# Allegro board AC7020.brd
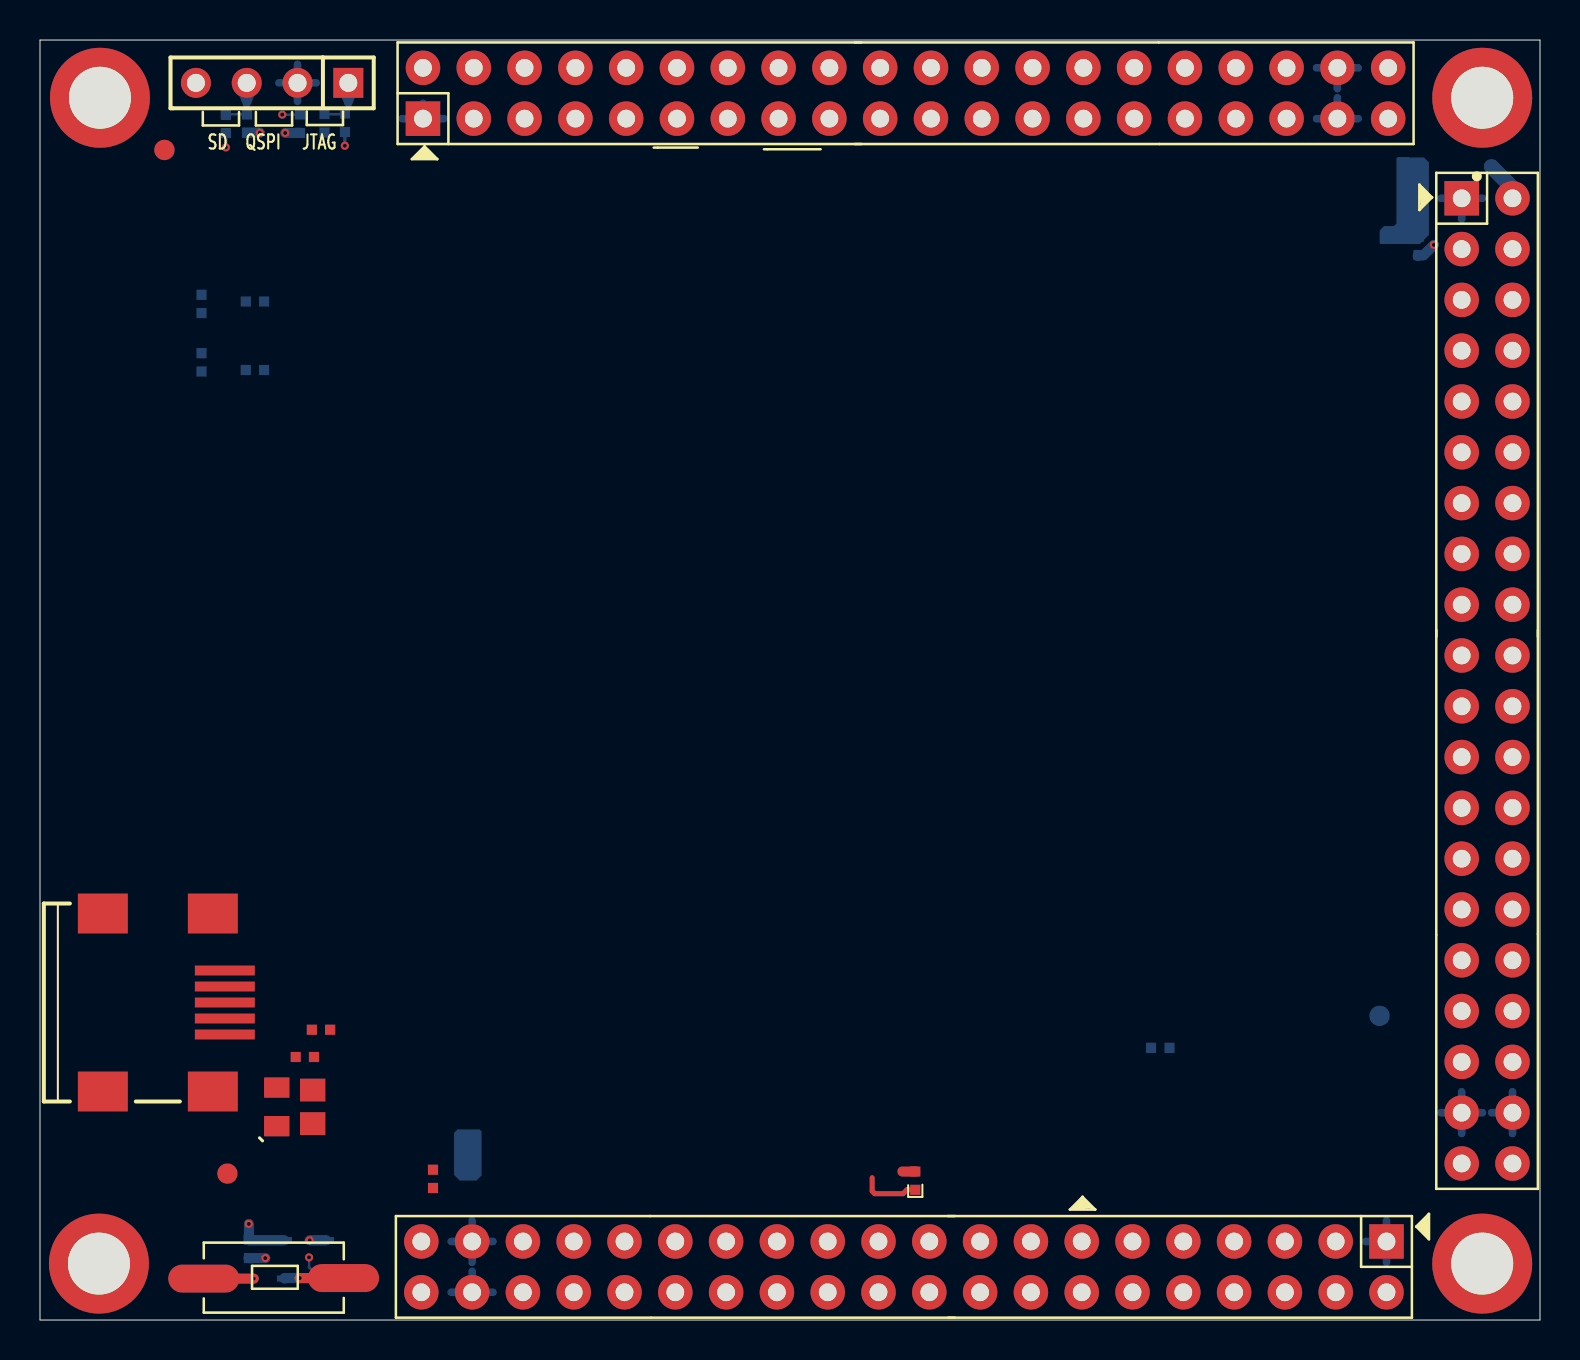
[diagram p0: board, top side]
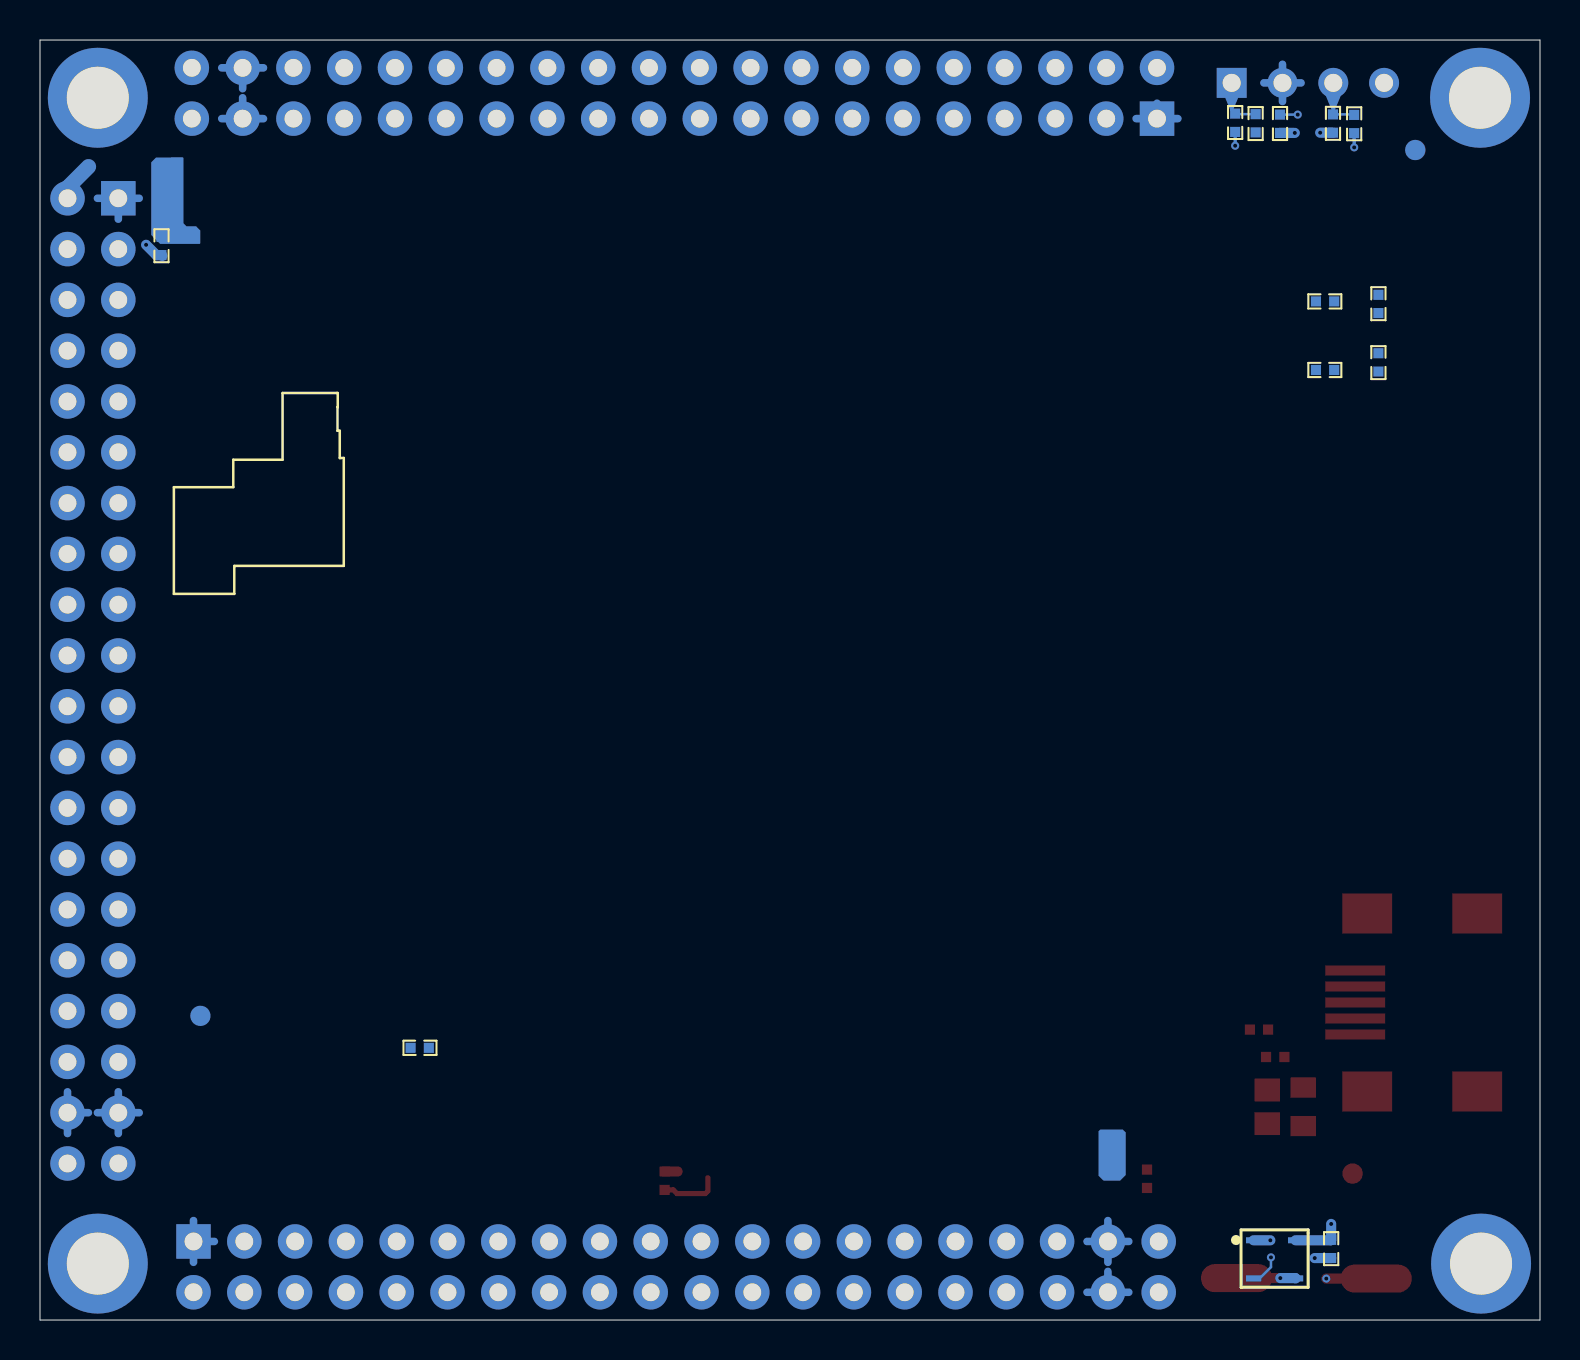
[diagram p1: board, bottom side, seen from below]

Outline 75 x 64 mm; copper layers: TOP, SGND, IN1, IN2, SVCC, IN3, SGND1, BOTTOM. Coordinates in mm from the lower left corner of the outline.
Outline path: 0,64 0,0 75,0 75,64 0,64

## Design rules (mm)
net group DDR3_ADRESS: nets DDR3_A14 DDR3_RESET
net group SD_CLK: nets N28238116 SD_CLK
net group BL-DIFF-J10: nets IO34_L1N IO34_L1P IO34_L2N IO34_L2P IO34_L3N IO34_L3P IO34_L4N IO34_L4P IO34_L5N IO34_L5P IO34_L6N IO34_L6P IO34_L7N IO34_L7P IO34_L8N IO34_L8P IO34_L9N IO34_L9P IO34_L10N IO34_L10P IO34_L11N IO34_L11P IO34_L13N IO34_L13P IO34_L14N IO34_L14P
net group BL-DIFF-J11: nets IO34_L15N IO34_L15P IO34_L16N IO34_L16P IO34_L17N IO34_L17P IO34_L18N IO34_L18P IO34_L19N IO34_L19P IO34_L20N IO34_L20P IO34_L21N IO34_L21P IO34_L22N IO34_L22P IO34_L23N IO34_L23P IO34_L24N IO34_L24P IO35_L7N IO35_L7P IO35_L9N IO35_L9P IO35_L11N IO35_L11P IO35_L21N IO35_L21P IO35_L22N IO35_L22P IO35_L23N IO35_L23P IO35_L24N IO35_L24P
net group BL-DIFF-J12: nets IO35_L1N IO35_L1P IO35_L2N IO35_L2P IO35_L3N IO35_L3P IO35_L4N IO35_L4P IO35_L5N IO35_L5P IO35_L6N IO35_L6P IO35_L8N IO35_L8P IO35_L10N IO35_L10P IO35_L12N IO35_L12P IO35_L13N IO35_L13P IO35_L14N IO35_L14P IO35_L15N IO35_L15P IO35_L16N IO35_L16P IO35_L17N IO35_L17P IO35_L18N IO35_L18P IO35_L19N IO35_L19P IO35_L20N IO35_L20P
net group DDR3_D0: nets DDR3_D0 DDR3_D1 DDR3_D2 DDR3_D3 DDR3_D4 DDR3_D5 DDR3_D6 DDR3_D7 DDR3_DQS0_N DDR3_DQS0_P
net group DDR3_D0-D7: nets DDR3_DM0
net group DDR3_D1: nets DDR3_D8 DDR3_D9 DDR3_D10 DDR3_D11 DDR3_D12 DDR3_D13 DDR3_D14 DDR3_D15 DDR3_DQS1_N DDR3_DQS1_P
net group DDR3_D2: nets DDR3_D16 DDR3_D17 DDR3_D18 DDR3_D19 DDR3_D20 DDR3_D21 DDR3_D22 DDR3_D23 DDR3_DQS2_N DDR3_DQS2_P
net group DDR3_D3: nets DDR3_D24 DDR3_D25 DDR3_D26 DDR3_D27 DDR3_D28 DDR3_D29 DDR3_D30 DDR3_D31 DDR3_DM3 DDR3_DQS3_N DDR3_DQS3_P
net group DDR3_D8-D15: nets DDR3_DM1
net group DDR3_D16-D23: nets DDR3_DM2
net group ETH_RX: nets ETH_RXCK ETH_RXCTL ETH_RXD0 ETH_RXD1 ETH_RXD2 ETH_RXD3
net group ETH_TX: nets ETH_TXCK ETH_TXCTL ETH_TXD0 ETH_TXD1 ETH_TXD2 ETH_TXD3
net group OTG_DATA: nets OTG_CLK OTG_DATA0 OTG_DATA1 OTG_DATA2 OTG_DATA3 OTG_DATA4 OTG_DATA5 OTG_DATA6 OTG_DATA7 OTG_DIR OTG_NXT OTG_STP
net group PHY_MDI: nets PHY_MDI0_N PHY_MDI0_P PHY_MDI1_N PHY_MDI1_P PHY_MDI2_N PHY_MDI2_P PHY_MDI3_N PHY_MDI3_P
net group QSPI: nets QSPI_CS QSPI_D0 QSPI_D1 QSPI_D2 QSPI_D3 QSPI_SCK
net group SD: nets SD_CD SD_CMD SD_D0 SD_D1 SD_D2 SD_D3
net group USB: nets N28234940 N28234974 OTG_D_N OTG_D_P

## Placement (name value [footprint] x y rotation side)
C27  0.1uF  [C0402]  10.44 3.55 270 bottom
C181  0.1uF  [C0402]  8.08 47.88 90 bottom
C182  0.1uF  [C0402]  8.08 50.8 270 bottom
C192  0.1uF  [C0402]  68.93 53.7 270 bottom
C200  10uF  [C0805]  13.63 10.66 270 top
C201  1uF  [C0402]  13.24 13.15 180 top
J7  MINI_USB  [MINIUSBB]  9.24 15.88 0 top
J10  HEADER 20x2/M  [IDC-40J]  43.2 2.66 180 top
J11  HEADER 20x2/M  [IDC-40J]  72.35 31.96 270 top
J12  HEADER 20x2/M  [IDC-40J]  43.28 61.34 0 top
J13  4 HEADER  [DIP-4]  15.42 61.86 180 top
KEY1  Button  [KEY735SO]  8.19 2.07 0 top
NOREF  -  [unnamed]  9.37 7.32 0 top
NOREF#2  -  [unnamed#2]  2.95 2.82 0 top
NOREF#3  -  [unnamed]  6.22 58.5 0 top
NOREF#4  -  [unnamed#2]  3 61.11 0 top
NOREF#5  -  [unnamed#2]  72.11 61.11 0 top
NOREF#6  -  [unnamed#2]  72.11 2.82 0 top
NOREF#7  -  [unnamed]  66.98 15.21 180 bottom
NOREF#8  -  [unnamed]  6.24 58.5 180 bottom
R19  20K  [R0402]  13 59.81 270 bottom
R21  10K  [R0402]  10.35 59.82 270 bottom
R22  1K  [R0402]  14.22 59.83 90 bottom
R23  20K  [R0402]  9.29 59.8 270 bottom
R24  20K  [R0402]  15.24 59.86 270 bottom
R35  4.7K  [R0402]  56.01 13.61 0 bottom
R40  330R  [R0402]  10.75 47.5 180 bottom
R41  330R  [R0402]  10.75 50.93 180 bottom
R94  4.7K  [R0402]  19.65 7.06 90 top
R159  10K  [R0402]  14.05 14.51 180 top
R161  0R  [R0805]  11.84 10.66 90 top
R216  100K  [R0402]  43.76 6.97 270 top
U7  -  [TCM811TERCTR]  13.27 3.03 270 bottom

## Library data of the parts
C27 C192 C200 C201 = CAP NP
C181 C182 = CAP_3
J7 = USB_B_3
J10-J12 = HEADER 20x2/M
J13 = 4 HEADER
KEY1 = Button_0
R19 R21-R24 R35 R94 R159 R216 = RESISTOR
R40 R41 = R_2
R161 = RESISTOR_0
U7 = TCM811TERCTR_0

## Footprints (pads in the part's own frame, mm; a bottom-side part is the same pattern mirrored in y, then rotated)
C0402
  rect 0.508x0.508 smd: 1(-0.457,0) 2(0.457,0)
C0805
  rect 1.143x1.27 smd: 1(-0.838,0) 2(0.838,0)
DIP-4
  rect 1.5x1.5 hole 0.9: 1(0,0)
  round 1.5 hole 0.9: 2(2.54,0) 3(5.08,0) 4(7.62,0)
IDC-40J
  rect 1.727x1.727 hole 0.889: 1(-24.13,-1.27)
  round 1.727 hole 0.889: 2(-24.13,1.27) 3(-21.59,-1.27) 4(-21.59,1.27) 5(-19.05,-1.27) 6(-19.05,1.27) 7(-16.51,-1.27) 8(-16.51,1.27) 9(-13.97,-1.27) 10(-13.97,1.27) 11(-11.43,-1.27) 12(-11.43,1.27) 13(-8.89,-1.27) 14(-8.89,1.27) 15(-6.35,-1.27) 16(-6.35,1.27) 17(-3.81,-1.27) 18(-3.81,1.27) 19(-1.27,-1.27) 20(-1.27,1.27) 21(1.27,-1.27) 22(1.27,1.27) 23(3.81,-1.27) 24(3.81,1.27) 25(6.35,-1.27) 26(6.35,1.27) 27(8.89,-1.27) 28(8.89,1.27) 29(11.43,-1.27) 30(11.43,1.27) 31(13.97,-1.27) 32(13.97,1.27) 33(16.51,-1.27) 34(16.51,1.27) 35(19.05,-1.27) 36(19.05,1.27) 37(21.59,-1.27) 38(21.59,1.27) 39(24.13,-1.27) 40(24.13,1.27)
KEY735SO
  oval 3.556x1.4 smd: 1(0,0) 2(6.985,0.025)
MINIUSBB
  rect 3x0.5 smd: 1(0,1.6) 2(0,0.8) 3(0,0) 4(0,-0.8) 5(0,-1.6)
  rect 2.5x2 smd: 6(-0.6,-4.45) 7(-6.1,-4.45) 8(-0.6,4.45) 9(-6.1,4.45)
R0402
  rect 0.508x0.508 smd: 1(-0.457,0) 2(0.457,0)
R0805
  rect 1.016x1.27 smd: 1(-0.965,0) 2(0.965,0)
TCM811TERCTR
  rect 0.305x0.762 smd: 1(-0.953,-1.05) 2(0.953,-1.05) 3(0.953,1.05) 4(-0.953,1.05)
unnamed
  round 1.016 smd: 1(0,0)
unnamed#2
  round 5 hole 3.1: 1(0,0)

## Nets
GND: C27.2 C181.2 C182.2 C192.2 C200.2 C201.2 J7.5(GND) J7.6(SH1) J7.7(SH2) J7.8(SH3) J7.9(SH4) J10.1 J10.37 J10.38 J11.1 J11.37 J11.38 J12.1 J12.37 J12.38 J13.2 KEY1.1(P1) R19.2 R21.2 R35.2 R94.1 U7.1(GND)
VCC3V3: C27.1 J10.39 J10.40 J11.39 J11.40 J12.39 J12.40 J13.4 R22.1 R216.1 U7.4(VDD)
VCC5V: C192.1 J10.2 J11.2 J12.2 R161.1
DDR3_RESET: R35.1
IO34_L1N: J10.27
IO34_L1P: J10.28
IO34_L2N: J10.25
IO34_L2P: J10.26
IO34_L3N: J10.21
IO34_L3P: J10.22
IO34_L4N: J10.24
IO34_L4P: J10.23
IO34_L5N: J10.19
IO34_L5P: J10.20
IO34_L6N: J10.18
IO34_L6P: J10.17
IO34_L7N: J10.10
IO34_L7P: J10.9
IO34_L8N: J10.14
IO34_L8P: J10.13
IO34_L9N: J10.5
IO34_L9P: J10.6
IO34_L10N: J10.11
IO34_L10P: J10.12
IO34_L11N: J10.16
IO34_L11P: J10.15
IO34_L13N: J10.8
IO34_L13P: J10.7
IO34_L14N: J10.3
IO34_L14P: J10.4
IO34_L15N: J11.13
IO34_L15P: J11.14
IO34_L16N: J11.21
IO34_L16P: J11.22
IO34_L17N: J11.26
IO34_L17P: J11.25
IO34_L18N: J11.30
IO34_L18P: J11.29
IO34_L19N: J11.20
IO34_L19P: J11.19
IO34_L20N: J11.12
IO34_L20P: J11.11
IO34_L21N: J11.28
IO34_L21P: J11.27
IO34_L22N: J11.23
IO34_L22P: J11.24
IO34_L23N: J11.4
IO34_L23P: J11.3
IO34_L24N: J11.6
IO34_L24P: J11.5
IO35_L1N: J12.30
IO35_L1P: J12.29
IO35_L2N: J12.28
IO35_L2P: J12.27
IO35_L3N: J12.3
IO35_L3P: J12.4
IO35_L4N: J12.32
IO35_L4P: J12.31
IO35_L5N: J12.34
IO35_L5P: J12.33
IO35_L6N: J12.6
IO35_L6P: J12.5
IO35_L7N: J11.9
IO35_L7P: J11.10
IO35_L8N: J12.26
IO35_L8P: J12.25
IO35_L9N: J11.7
IO35_L9P: J11.8
IO35_L10N: J12.19
IO35_L10P: J12.20
IO35_L11N: J11.18
IO35_L11P: J11.17
IO35_L12N: J12.13
IO35_L12P: J12.14
IO35_L13N: J12.18
IO35_L13P: J12.17
IO35_L14N: J12.10
IO35_L14P: J12.9
IO35_L15N: J12.36
IO35_L15P: J12.35
IO35_L16N: J12.16
IO35_L16P: J12.15
IO35_L17N: J12.11
IO35_L17P: J12.12
IO35_L18N: J12.8
IO35_L18P: J12.7
IO35_L19N: J12.22
IO35_L19P: J12.21
IO35_L20N: J12.24
IO35_L20P: J12.23
IO35_L21N: J11.32
IO35_L21P: J11.31
IO35_L22N: J11.36
IO35_L22P: J11.35
IO35_L23N: J11.34
IO35_L23P: J11.33
IO35_L24N: J11.16
IO35_L24P: J11.15
PHY_AD0/LED1: R40.1
PHY_AD1/LED2: R41.1
PS_MIO7: R19.1
PS_MIO8: J10.32
PS_MIO9: J10.29
PS_MIO10: J10.35
PS_MIO11: J10.31
PS_MIO12: J10.36
PS_MIO13: J10.33
PS_MIO14: J10.30
PS_MIO15: J10.34
PS_POR_B: U7.2(#RESET)
QSPI_D2: R23.2
QSPI_D3: R24.2
N27716782: C182.1 R41.2
N27716862: C181.1 R40.2
N27757110: R94.2
N28208691: R216.2
N28234940: J7.2(D-)
N28234974: J7.3(D+)
N28234993: R159.1
N28235009: C200.1 C201.1 R159.2
N28237125: J13.1 R22.2 R24.1
N28237130: J13.3 R21.1 R23.1
N28434462: J7.1(VCC) R161.2
N28529199: KEY1.2(P2) U7.3(#MR)

Pads without a net: J7 4; NOREF 1; NOREF#2 1; NOREF#3 1; NOREF#4 1; NOREF#5 1; NOREF#6 1; NOREF#7 1; NOREF#8 1

## Via types
v1: diameter 0.406, hole 0.203, TOP to BOTTOM, 12 vias

## Routing (per net, layer and track width the routed paths; a pad name or vN(x,y) marks a point on that pad's centre or on a via; arc(x,y) is an arc through that point)
GND: length 116.5
  TOP w0.508: KEY1.1 v1(10.69,2.07)
  SGND w0.381: J10.37 22.65,3.93 ; J10.37 21.61,2.88 ; J10.37 20.56,3.93 ; J10.37 21.61,4.97 ; J12.38 65.91,62.61 ; J12.38 63.83,62.61 ; J12.38 64.87,61.57 ; 67.33,2.88 J10.1 ; J10.1 66.28,3.93 ; J10.1 68.37,3.93 ; J10.1 67.33,4.97 ; 71.08,55.04 J11.1 ; J11.1 70.04,56.09 ; J11.1 72.13,56.09 ; J11.1 71.08,57.13 ; 19.15,59.03 J12.1 ; J12.1 19.15,61.11 ; J12.1 20.19,60.07 ; J12.1 18.11,60.07 ; J10.38 22.65,1.39 ; J10.38 20.56,1.39 ; J10.38 21.61,2.43 ; J13.2 13.8,61.86 ; J13.2 11.95,61.86 ; J13.2 12.88,60.93 ; J13.2 12.88,62.78 ; J12.37 64.87,61.11 ; J12.37 63.83,60.07 ; J12.37 64.87,59.03 ; J12.37 65.91,60.07 ; J11.37 72.13,10.37 ; J11.37 70.04,10.37 ; J11.37 71.08,9.32 ; J11.37 71.08,11.41 ; J11.38 73.62,11.41 ; J11.38 73.62,9.32 ; J11.38 72.58,10.37
  SGND1 w0.381: 11.95,61.86 J13.2 ; J13.2 12.88,60.93 ; J13.2 13.8,61.86 ; J13.2 12.88,62.78 ; 64.87,59.03 J12.37 ; J12.37 65.91,60.07 ; J12.37 63.83,60.07 ; J12.37 64.87,61.11 ; 70.04,10.37 J11.37 ; J11.37 72.13,10.37 ; J11.37 71.08,11.41 ; J11.37 71.08,9.32 ; J11.38 73.62,11.41 ; J11.38 72.58,10.37 ; J11.38 73.62,9.32 ; J12.1 20.19,60.07 ; J12.1 19.15,59.03 ; J12.1 19.15,61.11 ; J12.1 18.11,60.07 ; 70.04,56.09 J11.1 ; J11.1 72.13,56.09 ; J11.1 71.08,55.04 ; J11.1 71.08,57.13 ; J10.1 67.33,4.97 ; J10.1 67.33,2.88 ; J10.1 66.28,3.93 ; J10.1 68.37,3.93 ; 21.61,2.88 J10.37 ; J10.37 20.56,3.93 ; J10.37 21.61,4.97 ; J10.37 22.65,3.93 ; 63.83,62.61 J12.38 ; J12.38 64.87,61.57 ; J12.38 65.91,62.61 ; 20.56,1.39 J10.38 ; J10.38 21.61,2.43 ; J10.38 22.65,1.39
  BOTTOM w0.381: 63.83,62.61 J12.38 ; J12.38 65.91,62.61 ; J12.38 64.87,61.57 ; J10.37 22.65,3.93 ; J10.37 21.61,2.88 ; J10.37 21.61,4.97 ; J10.37 20.56,3.93 ; J13.2 12.88,62.78 ; J13.2 12.88,60.93 ; J13.2 11.95,61.86 ; J13.2 13.8,61.86 ; J10.38 22.65,1.39 ; J10.38 21.61,2.43 ; J10.38 20.56,1.39 ; J11.1 72.13,56.09 ; J11.1 70.04,56.09 ; J11.1 71.08,55.04 ; J12.37 65.91,60.07 ; J12.37 64.87,61.11 ; J12.37 63.83,60.07 ; 66.28,3.93 J10.1 ; J10.1 67.33,2.88 ; J10.1 67.33,4.97 ; 18.11,60.07 J12.1 ; J12.1 19.15,59.95 ; J12.1 20.19,60.07 ; J12.1 19.15,60.84 ; 72.58,10.37 J11.38 ; J11.38 73.62,11.41 ; J11.38 73.62,9.32 ; 71.08,9.32 J11.37 ; J11.37 71.08,11.41 ; J11.37 72.13,10.37 ; J11.37 70.04,10.37
  BOTTOM w0.508: R21.2 v1(10.99,59.36) ; v1(69.7,53.76) 69.18,53.24 C192.2 68.89,53.21 ; R19.2 v1(12.26,59.35) ; C27.2 v1(11.26,3.1) ; U7.1 v1(13.48,3.99)
VCC3V3: length 28.8
  TOP w0.508: R216.1 43.12,7.42
  SVCC w0.381: 6.87,61.86 J13.4 ; J13.4 7.8,62.78 ; J13.4 8.72,61.86 ; J13.4 7.8,60.93 ; 18.02,1.39 J10.40 ; J10.40 20.11,1.39 ; J10.40 19.07,2.43 ; 67.41,59.03 J12.39 ; J12.39 68.45,60.07 ; J12.39 66.37,60.07 ; J12.39 67.41,61.11 ; 67.41,61.57 J12.40 ; J12.40 66.37,62.61 ; J12.40 68.45,62.61 ; J10.39 19.07,4.97 ; J10.39 19.07,2.88 ; J10.39 20.11,3.93 ; J10.39 18.02,3.93 ; 71.08,6.78 J11.39 ; J11.39 70.04,7.83 ; J11.39 72.13,7.83 ; J11.39 71.08,8.87 ; 73.62,6.78 J11.40 ; J11.40 73.62,8.87 ; J11.40 72.58,7.83
  BOTTOM w0.508: v1(10.44,4.8) C27.1 10.47,3.99 U7.4
VCC5V: length 5.1
  IN3 w0.381: 18.11,62.61 J12.2 ; J12.2 19.15,61.57 ; J12.2 20.19,62.61
  BOTTOM w0.762: 72.58,57.67 73.62,56.62 J11.2
IO34_L1N: length 5
  IN3 w0.089: J10.27 34.31,2.89 34.39,2.8 35.05,2.8 35.48,3.22 35.48,5.82
IO34_L1P: length 5.4
  IN3 w0.089: J10.28 34.31,2.43 34.39,2.52 35.17,2.52 35.76,3.1 35.76,5.7
IO34_L2N: length 4
  IN3 w0.089: J10.25 36.85,2.89 36.93,2.8 37.64,2.8 37.97,3.13 37.97,4.79
IO34_L2P: length 4.3
  IN3 w0.089: 38.25,4.67 38.25,3.01 37.75,2.52 36.93,2.52 36.85,2.43 J10.26
IO34_L3N: length 27.3
  IN3 w0.089: 65.18,6.67 44.41,6.67 43.15,5.4 43.15,3.14 42.8,2.8 42.01,2.8 41.93,2.89 J10.21
IO34_L3P: length 27.4
  IN3 w0.089: 65.3,6.39 44.53,6.39 43.43,5.28 43.43,3.03 42.91,2.52 42.01,2.52 41.93,2.43 J10.22
IO34_L4N: length 30.1
  IN3 w0.089: J10.24 39.39,2.43 39.47,2.52 40.4,2.52 40.86,2.98 40.86,4.53 44.32,7.99 47.41,7.99 48.29,7.11 64.89,7.11
IO34_L4P: length 4
  IN3 w0.089: 40.58,4.65 40.58,3.1 40.28,2.8 39.47,2.8 39.39,2.89 J10.23
IO34_L5N: length 24.6
  IN3 w0.089: 65.58,5.96 46.69,5.96 46.5,5.77 46.49,5.77 45.63,4.9 45.63,3.02 45.4,2.8 44.55,2.8 44.47,2.89 J10.19
IO34_L5P: length 24.7
  IN3 w0.089: 65.69,5.68 46.81,5.68 46.61,5.49 46.61,5.49 45.91,4.78 45.91,2.91 45.52,2.52 44.55,2.52 44.47,2.43 J10.20
IO34_L6N: length 7
  IN2 w0.089: 48.4,6.03 48.16,5.79 47.65,5.79 47.58,5.71 47.58,5.6 47.65,5.52 48.16,5.52 48.4,5.28 48.4,2.9 48.02,2.52 47.09,2.52 47.01,2.43 J10.18
IO34_L6P: length 6.8
  IN2 w0.089: 48.13,6.26 48.13,6.15 48.05,6.07 47.54,6.07 47.3,5.83 47.3,5.48 47.54,5.24 48.05,5.24 48.13,5.16 48.13,3.01 47.91,2.8 47.09,2.8 47.01,2.89 J10.17
IO34_L7N: length 17.5
  IN2 w0.089: 65.71,5.7 59.85,5.7 59.77,5.62 59.77,5.35 59.53,5.11 59.19,5.11 58.94,5.35 58.94,5.62 58.87,5.7 56.48,5.7 56.42,5.64 56.42,5.36 56.5,5.28 58.32,5.28 58.58,5.03 58.58,2.94 58.16,2.52 57.25,2.52 57.17,2.43 J10.10
IO34_L7P: length 17.3
  IN2 w0.089: J10.9 57.17,2.89 57.25,2.8 58.04,2.8 58.3,3.05 58.3,4.91 58.21,5.01 56.38,5.01 56.14,5.25 56.14,5.75 56.37,5.98 58.98,5.98 59.22,5.74 59.22,5.47 59.3,5.39 59.41,5.39 59.49,5.47 59.49,5.74 59.73,5.98 65.59,5.98
IO34_L8N: length 6.5
  IN2 w0.089: J10.14 52.09,2.43 52.17,2.52 52.89,2.52 53.51,3.14 53.51,5.1 53.24,5.37 52.02,5.37 51.9,5.49
IO34_L8P: length 5.9
  IN2 w0.089: 51.62,5.38 51.91,5.09 53.13,5.09 53.23,4.98 53.23,3.26 52.77,2.8 52.17,2.8 52.09,2.89 J10.13
IO34_L9N: length 47.4
  IN3 w0.089: 69.51,44.25 69.51,8.62 66.2,5.31 63.97,5.31 63.45,4.79 63.45,3.13 63.12,2.8 62.33,2.8 62.25,2.89 J10.5
IO34_L9P: length 52.2
  IN3 w0.089: 68.57,47.28 68.91,47.28 69.16,47.03 69.16,46.69 68.36,45.9 68.36,45.79 69.79,44.36 69.79,8.5 66.32,5.03 64.09,5.03 63.73,4.67 63.73,3.01 63.23,2.52 62.33,2.52 62.25,2.43 J10.6
IO34_L10N: length 8
  IN2 w0.089: 52.26,6.03 52.53,5.76 54.69,5.76 55.74,4.71 55.74,3.06 55.48,2.8 54.71,2.8 54.63,2.89 J10.11
IO34_L10P: length 8.7
  IN2 w0.089: 52.54,6.3 52.54,6.15 52.65,6.04 54.81,6.04 56.02,4.83 56.02,2.94 55.6,2.52 54.71,2.52 54.63,2.43 J10.12
IO34_L11N: length 9
  IN2 w0.089: J10.16 49.55,2.43 49.63,2.52 50.61,2.52 50.98,2.88 50.98,5.36 50.73,5.6 49.32,5.6 49.24,5.68 49.24,5.79 49.32,5.87 50.73,5.87 50.98,6.11
IO34_L11P: length 8.6
  IN2 w0.089: J10.15 49.55,2.89 49.63,2.8 50.49,2.8 50.7,3 50.7,5.24 50.62,5.32 49.2,5.32 48.96,5.56 48.96,5.9 49.2,6.15 50.62,6.15 50.7,6.23
IO34_L13N: length 46.7
  IN2 w0.089: 69.11,40.81 69.11,7.92 66.23,5.05 61.41,5.05 61.09,4.73 61.09,2.91 60.69,2.52 59.79,2.52 59.71,2.43 J10.8
IO34_L13P: length 46.1
  IN2 w0.089: J10.7 59.71,2.89 59.79,2.8 60.58,2.8 60.81,3.03 60.81,4.85 61.29,5.33 66.12,5.33 68.83,8.04 68.83,40.7
IO34_L14N: length 47.9
  IN2 w0.089: 68.74,42.68 68.85,42.68 69.52,42.01 69.52,6.6 69.44,6.52 68.33,6.52 68.09,6.28 68.09,5.93 68.33,5.69 69.44,5.69 69.52,5.61 69.52,4.96 68.76,4.2 68.76,3.14 68.42,2.8 64.87,2.8 64.79,2.89 J10.3
IO34_L14P: length 49
  IN2 w0.089: 68.62,42.96 68.97,42.96 69.8,42.12 69.8,6.48 69.56,6.24 68.45,6.24 68.37,6.16 68.37,6.05 68.45,5.97 69.56,5.97 69.8,5.73 69.8,4.85 69.04,4.08 69.04,3.02 68.53,2.52 64.87,2.52 64.79,2.43 J10.4
IO34_L15N: length 7.8
  IN2 w0.089: 69.01,44.89 69.12,44.89 69.19,44.81 69.19,44.7 68.72,44.22 68.72,43.88 70.58,42.01 72.08,42.01 72.21,41.87 72.21,40.93 72.13,40.85 J11.13
IO34_L15P: length 8.4
  IN2 w0.089: 68.89,45.17 69.23,45.17 69.47,44.92 69.47,44.58 68.99,44.1 68.99,43.99 70.7,42.29 72.2,42.29 72.49,41.99 72.49,40.93 72.58,40.85 J11.14
IO34_L16N: length 13.8
  IN1 w0.089: J11.21 72.13,30.69 72.21,30.77 72.21,31.72 72.13,31.81 69.93,31.81 69.47,32.27 69.47,32.62 69.61,32.75 69.61,32.86 69.53,32.94 69.42,32.94 69.28,32.8 68.85,32.8 68.56,33.09 68.56,33.68 68.85,33.97 69.5,33.97 69.63,34.1 69.63,34.27 69.5,34.4 68.87,34.4 68.57,34.7 68.57,38.29
IO34_L16P: length 13.9
  IN1 w0.089: 68.85,38.41 68.85,34.81 68.99,34.68 69.62,34.68 69.91,34.39 69.91,33.98 69.62,33.69 68.97,33.69 68.84,33.56 68.84,33.21 68.97,33.08 69.16,33.08 69.3,33.22 69.64,33.22 69.89,32.98 69.89,32.64 69.75,32.5 69.75,32.39 70.05,32.09 72.24,32.09 72.49,31.84 72.49,30.77 72.58,30.69 J11.22
IO34_L17N: length 13.9
  IN1 w0.089: 68.94,31.23 68.94,29.46 69.02,29.38 69.23,29.38 69.47,29.14 69.47,28.8 69.23,28.56 69.02,28.56 68.94,28.48 68.94,25.43 69.07,25.3 69.27,25.3 69.4,25.43 69.4,26.73 69.71,27.04 72.17,27.04 72.49,26.72 72.49,25.69 72.58,25.61 J11.26
IO34_L17P: length 13.8
  IN1 w0.089: 68.66,31.12 68.66,29.34 68.91,29.1 69.12,29.1 69.19,29.02 69.19,28.91 69.12,28.84 68.91,28.84 68.66,28.59 68.66,25.31 68.95,25.02 69.39,25.02 69.68,25.31 69.68,26.61 69.82,26.76 72.06,26.76 72.21,26.6 72.21,25.69 72.13,25.61 J11.25
IO34_L18N: length 6.4
  IN1 w0.089: 68.49,21.93 72.26,21.93 72.49,21.69 72.49,20.61 72.58,20.53 J11.30
IO34_L18P: length 6
  IN1 w0.089: J11.29 72.13,20.53 72.21,20.61 72.21,21.58 72.15,21.65 68.37,21.65
IO34_L19N: length 17.7
  IN1 w0.089: J11.20 72.58,33.23 72.49,33.31 72.49,34.33 72.2,34.63 70.62,34.63 69.39,35.86 69.39,38.7 68.6,39.5 68.6,47.36
IO34_L19P: length 8.6
  IN1 w0.089: 69.11,38.59 69.11,35.75 70.51,34.35 72.08,34.35 72.21,34.22 72.21,33.31 72.13,33.23 J11.19
IO34_L20N: length 7.9
  IN2 w0.089: J11.12 72.58,43.39 72.49,43.47 72.49,44.54 72.26,44.78 70.54,44.78 69.08,46.23 69.08,47.82
IO34_L20P: length 7.8
  IN2 w0.089: J11.11 72.13,43.39 72.21,43.47 72.21,44.43 72.14,44.5 70.42,44.5 68.8,46.12 68.8,47.7
IO34_L21N: length 8.8
  IN1 w0.089: 68.44,24.45 68.77,24.45 69.02,24.21 69.02,23.09 69.09,23.01 69.2,23.01 69.28,23.09 69.28,24.21 69.52,24.45 72.16,24.45 72.49,24.11 72.49,23.15 72.58,23.07 J11.28
IO34_L21P: length 8.5
  IN1 w0.089: 68.33,24.17 68.66,24.17 68.74,24.09 68.74,22.97 68.98,22.73 69.32,22.73 69.56,22.97 69.56,24.09 69.64,24.17 72.04,24.17 72.21,24 72.21,23.15 72.13,23.07 J11.27
IO34_L22N: length 6.6
  IN1 w0.089: J11.23 72.13,28.15 72.21,28.23 72.21,29.3 72.15,29.37 70.17,29.37 69.43,30.11 69.43,31.3
IO34_L22P: length 6.7
  IN1 w0.089: 69.71,31.42 69.71,30.22 70.28,29.65 72.27,29.65 72.49,29.42 72.49,28.23 72.58,28.15 J11.24
IO34_L23N: length 12.2
  IN3 w0.089: 67.03,55.68 68,56.64 68.11,56.64 68.18,56.56 68.18,56.45 67.22,55.49 67.22,55.15 70.26,52.11 72.15,52.11 72.49,52.45 72.49,53.46 72.58,53.55 J11.4
IO34_L23P: length 11.9
  IN3 w0.089: 66.92,55.96 67.88,56.92 68.22,56.92 68.46,56.68 68.46,56.34 67.5,55.37 67.5,55.26 70.38,52.38 72.04,52.38 72.21,52.56 72.21,53.46 72.13,53.55 J11.3
IO34_L24N: length 7.4
  IN3 w0.089: 68.64,50.6 68.83,50.79 68.94,50.79 69.14,50.59 69.14,50.48 68.96,50.3 68.96,49.96 69.2,49.71 69.54,49.71 69.72,49.89 69.83,49.89 70.12,49.6 72,49.6 72.49,50.1 72.49,50.92 72.58,51.01 J11.6
IO34_L24P: length 8
  IN3 w0.089: 68.52,51.6 68.52,51.26 68.34,51.07 68.34,50.96 68.42,50.88 68.53,50.88 68.71,51.07 69.05,51.07 69.42,50.7 69.42,50.36 69.24,50.18 69.24,50.07 69.31,49.99 69.42,49.99 69.6,50.17 69.95,50.17 70.24,49.88 71.88,49.88 72.21,50.21 72.21,50.92 72.13,51.01 J11.5
IO35_L1N: length 7.3
  IN1 w0.089: 51.82,58.23 51.82,58.57 52.07,58.81 52.41,58.81 52.84,58.38 52.95,58.38 53.24,58.68 53.24,61.11 53.61,61.48 54.62,61.48 54.71,61.57 J12.30
IO35_L1P: length 6.7
  IN1 w0.089: J12.29 54.71,61.11 54.62,61.2 53.72,61.2 53.52,61 53.52,58.56 53.06,58.1 52.72,58.1 52.29,58.53 52.18,58.53 52.1,58.46 52.1,58.35
IO35_L2N: length 14.2
  IN1 w0.089: 41.44,58.2 41.97,58.73 50.08,58.73 50.78,59.43 50.78,61.21 51.06,61.48 52.08,61.48 52.17,61.57 J12.28
IO35_L2P: length 13.9
  IN1 w0.089: J12.27 52.17,61.11 52.08,61.2 51.17,61.2 51.06,61.09 51.06,59.32 50.2,58.45 42.08,58.45 41.72,58.08
IO35_L3N: length 4.2
  IN2 w0.089: J12.3 21.69,61.11 21.78,61.2 22.61,61.2 22.79,61.02 22.79,59.08
IO35_L3P: length 4.5
  IN2 w0.089: J12.4 21.69,61.57 21.78,61.48 22.73,61.48 23.07,61.14 23.07,59.2
IO35_L4N: length 6.4
  IN1 w0.089: J12.32 57.25,61.57 57.16,61.48 56.16,61.48 55.84,61.15 55.84,59.01 55.41,58.57 54.39,58.57
IO35_L4P: length 6.3
  IN1 w0.089: 54.51,58.3 55.52,58.3 56.12,58.89 56.12,61.04 56.28,61.2 57.16,61.2 57.25,61.11 J12.31
IO35_L5N: length 2.7
  IN1 w0.089: J12.34 59.79,61.57 59.7,61.48 58.82,61.48 58.37,61.03
IO35_L5P: length 2.3
  IN1 w0.089: J12.33 59.79,61.11 59.7,61.2 58.93,61.2 58.65,60.91
IO35_L6N: length 4.2
  IN2 w0.089: J12.6 24.23,61.57 24.32,61.48 25.16,61.48 25.65,60.98 25.65,59.49
IO35_L6P: length 3.8
  IN2 w0.089: J12.5 24.23,61.11 24.32,61.2 25.04,61.2 25.37,60.87 25.37,59.38
IO35_L7N: length 6.9
  IN2 w0.089: J11.9 72.13,45.93 72.21,46.01 72.21,46.88 72,47.09 70.04,47.09 69.56,47.57 69.56,49.45
IO35_L7P: length 7
  IN2 w0.089: 69.83,49.57 69.83,47.68 70.15,47.37 72.12,47.37 72.49,46.99 72.49,46.01 72.58,45.93 J11.10
IO35_L8N: length 15.2
  IN3 w0.089: 55.08,57.16 55.16,57.24 57.21,57.24 57.45,57.48 57.45,57.82 57.21,58.06 55.16,58.06 55.08,58.14 55.08,58.47 54.78,58.78 54.1,58.78 53.86,58.53 53.86,58.22 53.78,58.14 53.67,58.14 53.59,58.22 53.59,58.53 53.35,58.78 51.92,58.78 51.04,59.66 51.04,61.07 50.63,61.48 49.72,61.48 49.63,61.57 J12.26
IO35_L8P: length 14.6
  IN3 w0.089: 54.8,57.27 55.04,57.51 57.1,57.51 57.18,57.59 57.18,57.7 57.1,57.78 55.04,57.78 54.8,58.02 54.8,58.35 54.66,58.5 54.22,58.5 54.14,58.42 54.14,58.11 53.9,57.87 53.56,57.87 53.32,58.11 53.32,58.42 53.24,58.5 51.8,58.5 50.76,59.54 50.76,60.96 50.52,61.2 49.72,61.2 49.63,61.11 J12.25
IO35_L9N: length 4
  IN2 w0.089: 70.34,49.68 71.92,49.68 72.21,49.39 72.21,48.55 72.13,48.47 J11.7
IO35_L9P: length 4.4
  IN2 w0.089: 70.45,49.96 72.04,49.96 72.49,49.51 72.49,48.55 72.58,48.47 J11.8
IO35_L10N: length 6.1
  IN3 w0.089: 42.01,57.73 43.18,58.89 43.18,61.1 43.08,61.2 42.1,61.2 42.01,61.11 J12.19
IO35_L10P: length 6.7
  IN3 w0.089: 42.29,57.61 43.46,58.78 43.46,61.21 43.2,61.48 42.1,61.48 42.01,61.57 J12.20
IO35_L11N: length 15.6
  IN1 w0.089: J11.18 72.58,35.77 72.49,35.85 72.49,36.95 72.2,37.24 70.12,37.24 69.95,37.42 69.95,39.18 69.22,39.91 69.22,47.7
IO35_L11P: length 15.5
  IN1 w0.089: J11.17 72.13,35.77 72.21,35.85 72.21,36.84 72.09,36.96 70.01,36.96 69.67,37.3 69.67,39.07 68.94,39.8 68.94,47.58
IO35_L12N: length 16.5
  IN2 w0.089: J12.13 34.39,61.11 34.48,61.2 35.36,61.2 35.53,61.03 35.53,58.53 36.4,57.67 46.83,57.67
IO35_L12P: length 16.6
  IN2 w0.089: 46.95,57.95 36.51,57.95 35.81,58.65 35.81,61.15 35.48,61.48 34.48,61.48 34.39,61.57 J12.14
IO35_L13N: length 8.8
  IN3 w0.089: 41.49,57.27 41.49,57.61 41.25,57.85 40.98,57.85 40.9,57.93 40.9,58.17 40.66,58.41 39.79,58.41 39.71,58.49 39.71,58.6 39.79,58.68 40.66,58.68 40.9,58.92 40.9,60.95 40.37,61.48 39.56,61.48 39.47,61.57 J12.18
IO35_L13P: length 8.6
  IN3 w0.089: J12.17 39.47,61.11 39.56,61.2 40.26,61.2 40.62,60.84 40.62,59.03 40.54,58.96 39.67,58.96 39.43,58.71 39.43,58.37 39.67,58.13 40.54,58.13 40.62,58.05 40.62,57.81 40.86,57.57 41.14,57.57 41.21,57.49 41.21,57.38 41.14,57.3 40.86,57.3
IO35_L14N: length 5.2
  IN2 w0.089: J12.10 29.31,61.57 29.4,61.48 30.35,61.48 30.73,61.1 30.73,58.59
IO35_L14P: length 4.8
  IN2 w0.089: J12.9 29.31,61.11 29.4,61.2 30.23,61.2 30.45,60.99 30.45,58.48
IO35_L15N: length 7.5
  IN1 w0.089: 62.88,58.06 62.88,58.47 62.79,58.56 61.21,58.56 60.86,58.91 60.86,61.04 61.3,61.48 62.24,61.48 62.33,61.57 J12.36
IO35_L15P: length 6.5
  IN1 w0.089: 63.15,58.59 62.9,58.84 61.32,58.84 61.14,59.02 61.14,60.92 61.42,61.2 62.24,61.2 62.33,61.11 J12.35
IO35_L16N: length 2.7
  IN3 w0.089: J12.16 36.93,61.57 37.02,61.48 37.82,61.48 38.36,60.93
IO35_L16P: length 2.4
  IN3 w0.089: J12.15 36.93,61.11 37.02,61.2 37.7,61.2 38.08,60.82
IO35_L17N: length 5.2
  IN2 w0.089: 32.97,58 32.97,60.94 32.71,61.2 31.94,61.2 31.85,61.11 J12.11
IO35_L17P: length 5.6
  IN2 w0.089: J12.12 31.85,61.57 31.94,61.48 32.82,61.48 33.25,61.05 33.25,58.11
IO35_L18N: length 4.5
  IN2 w0.089: 28.21,59.3 28.21,61.11 27.85,61.48 26.86,61.48 26.77,61.57 J12.8
IO35_L18P: length 4.1
  IN2 w0.089: J12.7 26.77,61.11 26.86,61.2 27.73,61.2 27.93,60.99 27.93,59.18
IO35_L19N: length 8.1
  IN3 w0.089: 47.47,57.16 47.47,57.51 47.05,57.92 47.05,58.03 47.28,58.26 47.28,58.6 47.04,58.84 46.7,58.84 46.47,58.62 46.36,58.62 46.01,58.97 46.01,61 45.53,61.48 44.64,61.48 44.55,61.57 J12.22
IO35_L19P: length 7.5
  IN3 w0.089: J12.21 44.55,61.11 44.64,61.2 45.41,61.2 45.73,60.88 45.73,58.85 46.24,58.34 46.59,58.34 46.81,58.56 46.92,58.56 47,58.49 47,58.38 46.78,58.15 46.78,57.81 47.19,57.39 47.19,57.28
IO35_L20N: length 9
  IN3 w0.089: J12.24 47.09,61.57 47.18,61.48 48.1,61.48 48.5,61.08 48.5,58.88 48.78,58.6 50.15,58.6 50.38,58.37 50.49,58.37 50.76,58.64 51.11,58.64 51.35,58.39 51.35,58.05 51.08,57.78 51.08,57.67
IO35_L20P: length 8.6
  IN3 w0.089: J12.23 47.09,61.11 47.18,61.2 47.99,61.2 48.22,60.97 48.22,58.76 48.66,58.32 50.03,58.32 50.27,58.09 50.61,58.09 50.88,58.36 50.99,58.36 51.07,58.28 51.07,58.17 50.8,57.9 50.8,57.56
IO35_L21N: length 5.7
  IN1 w0.089: J11.32 72.58,17.99 72.49,18.07 72.49,19.01 72.08,19.43 69.04,19.43
IO35_L21P: length 5.4
  IN1 w0.089: J11.31 72.13,17.99 72.21,18.07 72.21,18.9 71.96,19.15 68.93,19.15
IO35_L22N: length 5.6
  IN1 w0.089: 69.15,14.32 72.09,14.32 72.49,13.91 72.49,12.99 72.58,12.91 J11.36
IO35_L22P: length 5.3
  IN1 w0.089: J11.35 72.13,12.91 72.21,12.99 72.21,13.8 71.97,14.04 69.03,14.04
IO35_L23N: length 4.9
  IN1 w0.089: J11.34 72.58,15.45 72.49,15.53 72.49,16.52 72.2,16.81 69.86,16.81
IO35_L23P: length 4.6
  IN1 w0.089: J11.33 72.13,15.45 72.21,15.53 72.21,16.4 72.08,16.54 69.74,16.54
IO35_L24N: length 17.8
  IN1 w0.089: J11.16 72.58,38.31 72.49,38.39 72.49,39.51 72.24,39.77 70.51,39.77 69.94,40.33 69.94,52.97
IO35_L24P: length 17.7
  IN1 w0.089: 69.66,52.85 69.66,40.21 70.39,39.49 72.13,39.49 72.21,39.4 72.21,38.39 72.13,38.31 J11.15
PS_MIO7: length 23.7
  IN1 w0.127: 34.01,58.13 18.58,58.13 16.44,60.27 v1(12.11,60.27)
  BOTTOM w0.127: R19.1 v1(12.11,60.27)
PS_MIO10: length 0.2
  IN1 w0.127: 24.15,4.11 24.15,3.93 J10.35
PS_MIO12: length 3.8
  IN1 w0.127: 25.45,4.61 25.45,2.69 J10.36
PS_MIO13: length 1
  IN1 w0.127: J10.33 26.69,4.92
PS_MIO14: length 2
  IN1 w0.127: J10.30 33.15,2.77
PS_MIO15: length 4.5
  IN1 w0.127: 28.04,5.33 28.04,2.75 J10.34
PS_POR_B: length 1.6
  BOTTOM w0.127: v1(13.45,3.13) 13.45,2.64 14.02,2.08 U7.2
QSPI_D2: length 11.1
  IN2 w0.102: 19.11,57.19 16.01,57.19 14.83,58.37 9.55,58.37 v1(9.29,58.63)
  BOTTOM w0.17: R23.2 v1(9.29,58.63)
QSPI_D3: length 5.2
  IN2 w0.102: 19.26,57.64 16.32,57.64 v1(15.24,58.71)
  BOTTOM w0.17: R24.2 v1(15.24,58.71)
N28208691: length 3
  TOP w0.254: R216.2 43.34,6.51 43.15,6.32 41.73,6.32 41.61,6.44 41.61,7.11
N28237125: length 2.6
  BOTTOM w0.127: J13.1 15.42,60.49 R24.1 15.21,60.29 R22.2
N28237130: length 2.7
  BOTTOM w0.127: J13.3 10.34,60.29 R21.1 9.31,60.28 R23.1
N28529199: length 3
  TOP w0.508: KEY1.2 v1(12.98,2.1)
  BOTTOM w0.508: U7.3 12.23,2.1 v1(12.98,2.1)

## Copper pours and planes (outline as drawn; the poured copper is in the pictures)
VCC5V on BOTTOM (solid shape): 22.08,9.43 22.08,7.22 21.83,6.97 21,6.97 20.71,7.25 20.71,9.37 20.86,9.52 21.99,9.52
VCC5V on BOTTOM (solid shape): 68.45,58.12 69.2,58.12 69.44,57.88 69.44,54.25 68.99,53.8 67.04,53.8 67,53.82 66.98,53.86 66.98,54.48 67.19,54.69 67.68,54.69 67.83,54.84 67.83,58.08 67.84,58.12 67.88,58.14 68.45,58.14
PS_MIO12 on IN1 (solid shape): 25.18,2.51 25.25,2.49 25.26,2.42 24.77,1.23 24.13,1.38 23.99,2.01
PS_MIO14 on IN1 (solid shape): 32.8,2.51 32.87,2.49 32.88,2.42 32.39,1.23 31.75,1.38 31.61,2.01
PS_MIO15 on IN1 (solid shape): 27.72,2.51 27.79,2.49 27.8,2.42 27.31,1.23 26.67,1.38 26.53,2.01
N28237130 on BOTTOM (solid shape): 10.86,61.57 10.39,60.45 10.34,60.41 10.28,60.45 9.81,61.57 10.34,61.87

Small or netless copper shapes (teardrops, artwork), in the pictures only: 1 on BOTTOM, 32 on IN1, 34 on IN2, 28 on IN3

## Text on the board
Ref Des/Silkscreen Top: SD | QSPI | JTAG
User.11: 75MM | 64MM
